# EAGLE board MRCS-Hankscraft-Contact-array (EAGLE 7.7.0)
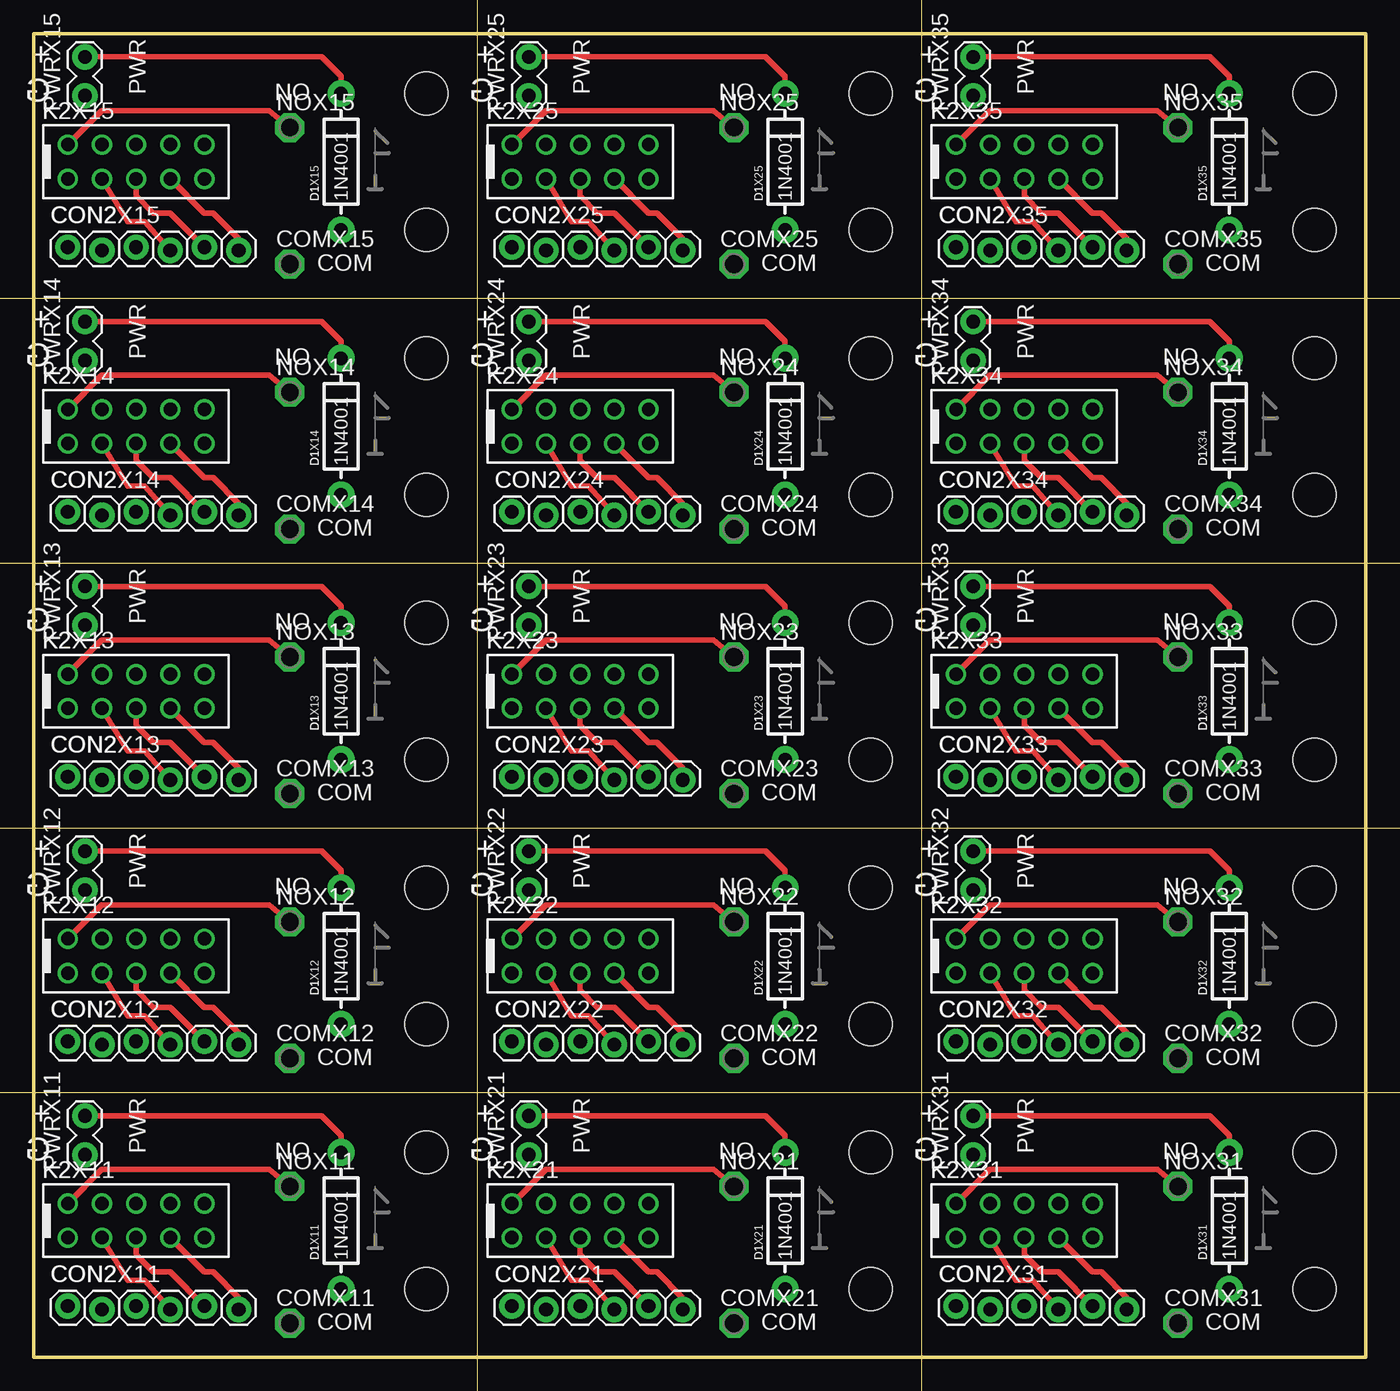
[diagram p0: board, top side]
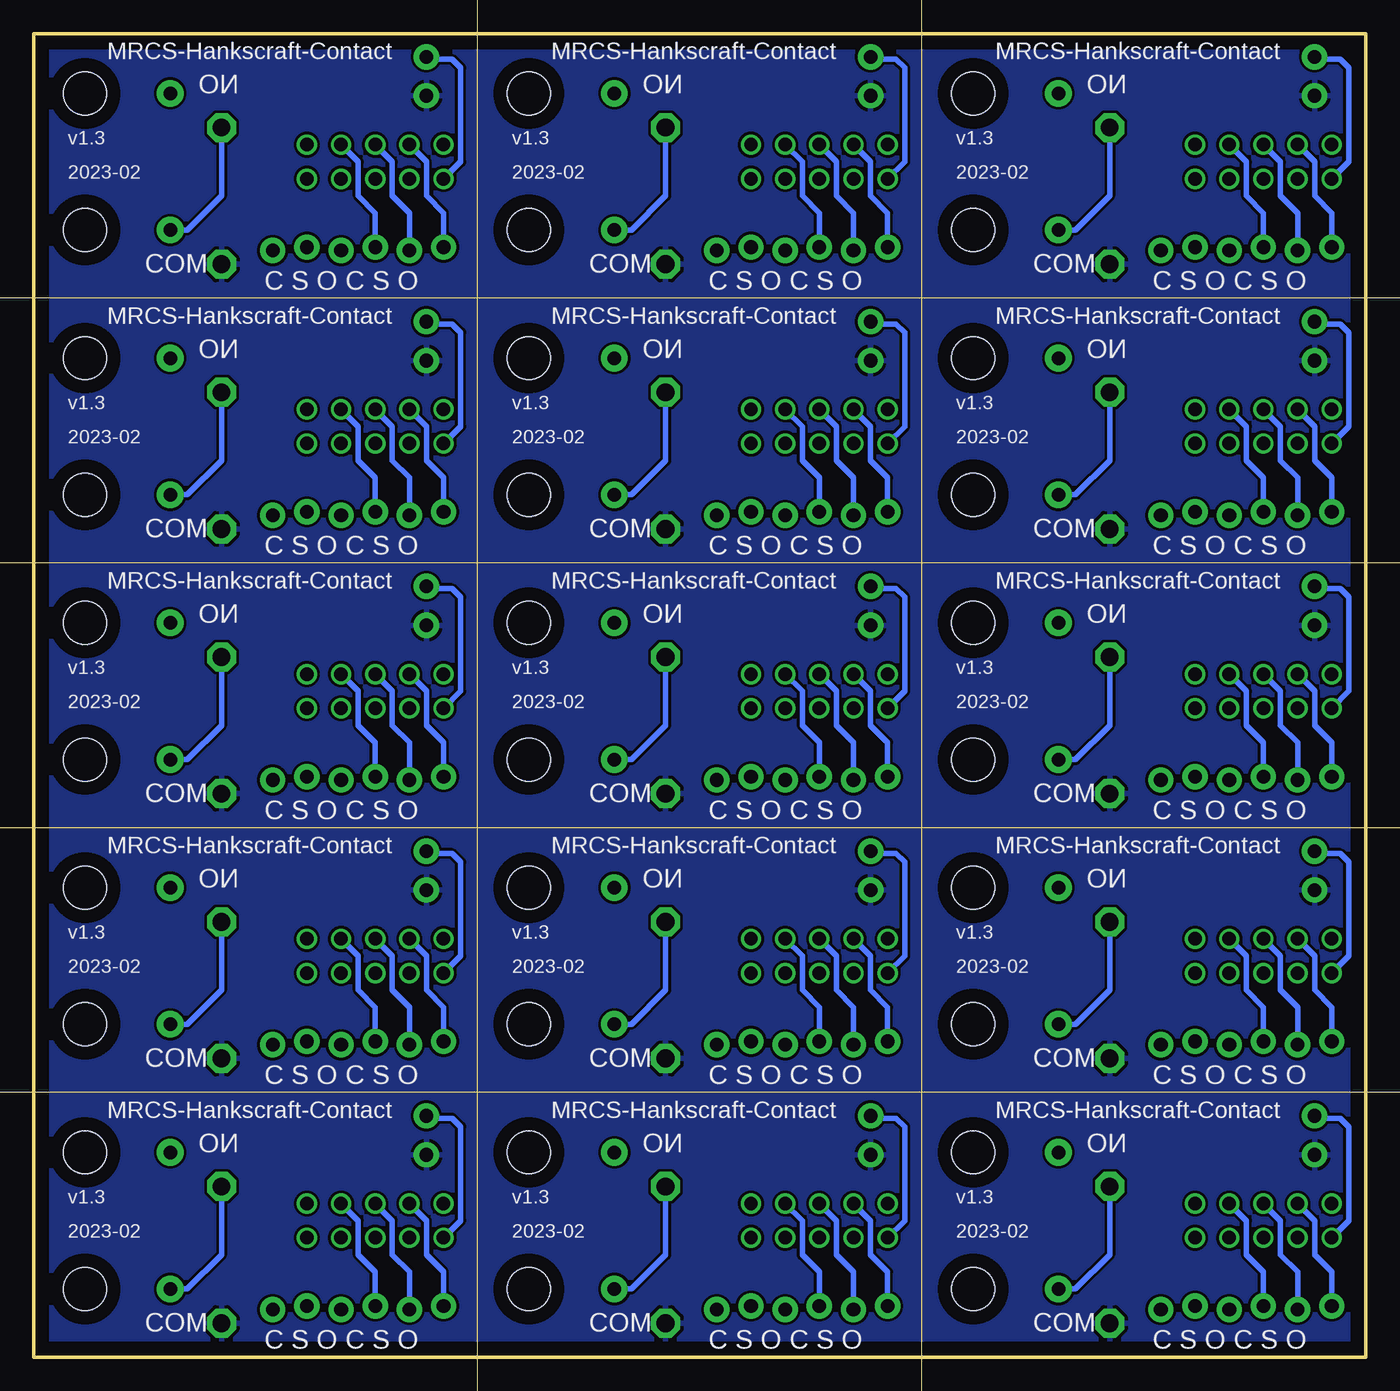
[diagram p1: board, bottom side, seen from below]

Size 99.06 x 98.42 mm. Coordinates in mm from the lower left corner, seen from the top.
Outline: 0,0 99.06,0 99.06,98.42 0,98.42 0,0
Copper layers (1*16): Top 0.035mm / dielectric 1.5mm / Bottom 0.035mm
Design rules "default": minimum track width 10mil, minimum drill 24mil, track to track 8mil, track to pad 8mil, pad to pad 8mil, via to via 8mil, smd to smd 8mil, copper to edge 40mil, drill to drill 8mil, minimum pad ring 10mil, minimum via ring 8mil, stop-mask expansion 4mil, vias tented up to drill 0mil, thermal gap 10mil
Holes 3.2 mm at 29.21,15.24 29.21,5.08 29.21,34.92 29.21,24.77 29.21,54.61 29.21,44.45 29.21,74.3 29.21,64.14 29.21,93.98 29.21,83.82 62.23,15.24 62.23,5.08 62.23,34.92 62.23,24.77 62.23,54.61 62.23,44.45 62.23,74.3 62.23,64.14 62.23,93.98 62.23,83.82 95.25,15.24 95.25,5.08 95.25,34.92 95.25,24.77 95.25,54.61 95.25,44.45 95.25,74.3 95.25,64.14 95.25,93.98 95.25,83.82
Milling: 6 lines

## Footprints (pad centres in the part's own frame; a part is rotated, then mirrored left to right if it is on the bottom)
P1-13 = drill 1.321 pad 2.159 octagon: TP 0,0
1X06_LOCK = drill 1.016 pad 1.88: 1 0,0; 2 2.54,-0.254; 3 5.08,0; 4 7.62,-0.254; 5 10.16,0; 6 12.7,-0.254
DIODE-1N4001 = drill 1 pad 1.981: A 5.08,0; C -5.08,0
TN2 = drill 1: 1 -5.08,-1.27; 2 -2.54,-1.27; 3 0,-1.27; 4 2.54,-1.27; 5 5.08,-1.27; 6 5.08,1.27; 7 2.54,1.27; 8 0,1.27; 9 -2.54,1.27; 10 -5.08,1.27
1X02_LOCK = drill 1.016 pad 1.88: 1 -0.178,0; 2 2.718,0

## Placement (x,y rotation side)
COMX11  TPPAD1-13  [P1-13]  19.05,2.54 0 top
COMX12  TPPAD1-13  [P1-13]  19.05,22.23 0 top
COMX13  TPPAD1-13  [P1-13]  19.05,41.91 0 top
COMX14  TPPAD1-13  [P1-13]  19.05,61.59 0 top
COMX15  TPPAD1-13  [P1-13]  19.05,81.28 0 top
COMX21  TPPAD1-13  [P1-13]  52.07,2.54 0 top
COMX22  TPPAD1-13  [P1-13]  52.07,22.23 0 top
COMX23  TPPAD1-13  [P1-13]  52.07,41.91 0 top
COMX24  TPPAD1-13  [P1-13]  52.07,61.59 0 top
COMX25  TPPAD1-13  [P1-13]  52.07,81.28 0 top
COMX31  TPPAD1-13  [P1-13]  85.09,2.54 0 top
COMX32  TPPAD1-13  [P1-13]  85.09,22.23 0 top
COMX33  TPPAD1-13  [P1-13]  85.09,41.91 0 top
COMX34  TPPAD1-13  [P1-13]  85.09,61.59 0 top
COMX35  TPPAD1-13  [P1-13]  85.09,81.28 0 top
CON2X11  [1X06_LOCK]  2.54,3.81 0 top
CON2X12  [1X06_LOCK]  2.54,23.5 0 top
CON2X13  [1X06_LOCK]  2.54,43.18 0 top
CON2X14  [1X06_LOCK]  2.54,62.87 0 top
CON2X15  [1X06_LOCK]  2.54,82.55 0 top
CON2X21  [1X06_LOCK]  35.56,3.81 0 top
CON2X22  [1X06_LOCK]  35.56,23.5 0 top
CON2X23  [1X06_LOCK]  35.56,43.18 0 top
CON2X24  [1X06_LOCK]  35.56,62.87 0 top
CON2X25  [1X06_LOCK]  35.56,82.55 0 top
CON2X31  [1X06_LOCK]  68.58,3.81 0 top
CON2X32  [1X06_LOCK]  68.58,23.5 0 top
CON2X33  [1X06_LOCK]  68.58,43.18 0 top
CON2X34  [1X06_LOCK]  68.58,62.87 0 top
CON2X35  [1X06_LOCK]  68.58,82.55 0 top
D1X11  1N4001  [DIODE-1N4001]  22.86,10.16 270 top
D1X12  1N4001  [DIODE-1N4001]  22.86,29.84 270 top
D1X13  1N4001  [DIODE-1N4001]  22.86,49.53 270 top
D1X14  1N4001  [DIODE-1N4001]  22.86,69.22 270 top
D1X15  1N4001  [DIODE-1N4001]  22.86,88.9 270 top
D1X21  1N4001  [DIODE-1N4001]  55.88,10.16 270 top
D1X22  1N4001  [DIODE-1N4001]  55.88,29.84 270 top
D1X23  1N4001  [DIODE-1N4001]  55.88,49.53 270 top
D1X24  1N4001  [DIODE-1N4001]  55.88,69.22 270 top
D1X25  1N4001  [DIODE-1N4001]  55.88,88.9 270 top
D1X31  1N4001  [DIODE-1N4001]  88.9,10.16 270 top
D1X32  1N4001  [DIODE-1N4001]  88.9,29.84 270 top
D1X33  1N4001  [DIODE-1N4001]  88.9,49.53 270 top
D1X34  1N4001  [DIODE-1N4001]  88.9,69.22 270 top
D1X35  1N4001  [DIODE-1N4001]  88.9,88.9 270 top
K2X11  TN2-4.5V  [TN2]  7.62,10.16 0 top
K2X12  TN2-4.5V  [TN2]  7.62,29.84 0 top
K2X13  TN2-4.5V  [TN2]  7.62,49.53 0 top
K2X14  TN2-4.5V  [TN2]  7.62,69.22 0 top
K2X15  TN2-4.5V  [TN2]  7.62,88.9 0 top
K2X21  TN2-4.5V  [TN2]  40.64,10.16 0 top
K2X22  TN2-4.5V  [TN2]  40.64,29.84 0 top
K2X23  TN2-4.5V  [TN2]  40.64,49.53 0 top
K2X24  TN2-4.5V  [TN2]  40.64,69.22 0 top
K2X25  TN2-4.5V  [TN2]  40.64,88.9 0 top
K2X31  TN2-4.5V  [TN2]  73.66,10.16 0 top
K2X32  TN2-4.5V  [TN2]  73.66,29.84 0 top
K2X33  TN2-4.5V  [TN2]  73.66,49.53 0 top
K2X34  TN2-4.5V  [TN2]  73.66,69.22 0 top
K2X35  TN2-4.5V  [TN2]  73.66,88.9 0 top
NOX11  TPPAD1-13  [P1-13]  19.05,12.7 0 top
NOX12  TPPAD1-13  [P1-13]  19.05,32.38 0 top
NOX13  TPPAD1-13  [P1-13]  19.05,52.07 0 top
NOX14  TPPAD1-13  [P1-13]  19.05,71.75 0 top
NOX15  TPPAD1-13  [P1-13]  19.05,91.44 0 top
NOX21  TPPAD1-13  [P1-13]  52.07,12.7 0 top
NOX22  TPPAD1-13  [P1-13]  52.07,32.38 0 top
NOX23  TPPAD1-13  [P1-13]  52.07,52.07 0 top
NOX24  TPPAD1-13  [P1-13]  52.07,71.75 0 top
NOX25  TPPAD1-13  [P1-13]  52.07,91.44 0 top
NOX31  TPPAD1-13  [P1-13]  85.09,12.7 0 top
NOX32  TPPAD1-13  [P1-13]  85.09,32.38 0 top
NOX33  TPPAD1-13  [P1-13]  85.09,52.07 0 top
NOX34  TPPAD1-13  [P1-13]  85.09,71.75 0 top
NOX35  TPPAD1-13  [P1-13]  85.09,91.44 0 top
PWRX11  [1X02_LOCK]  3.81,15.24 90 top
PWRX12  [1X02_LOCK]  3.81,34.92 90 top
PWRX13  [1X02_LOCK]  3.81,54.61 90 top
PWRX14  [1X02_LOCK]  3.81,74.3 90 top
PWRX15  [1X02_LOCK]  3.81,93.98 90 top
PWRX21  [1X02_LOCK]  36.83,15.24 90 top
PWRX22  [1X02_LOCK]  36.83,34.92 90 top
PWRX23  [1X02_LOCK]  36.83,54.61 90 top
PWRX24  [1X02_LOCK]  36.83,74.3 90 top
PWRX25  [1X02_LOCK]  36.83,93.98 90 top
PWRX31  [1X02_LOCK]  69.85,15.24 90 top
PWRX32  [1X02_LOCK]  69.85,34.92 90 top
PWRX33  [1X02_LOCK]  69.85,54.61 90 top
PWRX34  [1X02_LOCK]  69.85,74.3 90 top
PWRX35  [1X02_LOCK]  69.85,93.98 90 top
U$1X11  [MRCSLOGOTOP]  24.13,7.62 0 top
U$1X12  [MRCSLOGOTOP]  24.13,27.3 0 top
U$1X13  [MRCSLOGOTOP]  24.13,46.99 0 top
U$1X14  [MRCSLOGOTOP]  24.13,66.67 0 top
U$1X15  [MRCSLOGOTOP]  24.13,86.36 0 top
U$1X21  [MRCSLOGOTOP]  57.15,7.62 0 top
U$1X22  [MRCSLOGOTOP]  57.15,27.3 0 top
U$1X23  [MRCSLOGOTOP]  57.15,46.99 0 top
U$1X24  [MRCSLOGOTOP]  57.15,66.67 0 top
U$1X25  [MRCSLOGOTOP]  57.15,86.36 0 top
U$1X31  [MRCSLOGOTOP]  90.17,7.62 0 top
U$1X32  [MRCSLOGOTOP]  90.17,27.3 0 top
U$1X33  [MRCSLOGOTOP]  90.17,46.99 0 top
U$1X34  [MRCSLOGOTOP]  90.17,66.67 0 top
U$1X35  [MRCSLOGOTOP]  90.17,86.36 0 top

## Library data of the parts
COMX11-COMX15 COMX21-COMX25 COMX31-COMX35 NOX11-NOX15 NOX21-NOX25 NOX31-NOX35 = testpad
CON2X11-CON2X15 CON2X21-CON2X25 CON2X31-CON2X35 D1X11-D1X15 D1X21-D1X25 D1X31-D1X35 PWRX11-PWRX15 PWRX21-PWRX25 PWRX31-PWRX35 = SPCoast
K2X11-K2X15 K2X21-K2X25 K2X31-K2X35 = relay
U$1X11-U$1X15 U$1X21-U$1X25 U$1X31-U$1X35 = MRCSLogoTop

## Nets
GNDX11: COMX11.TP PWRX11.1
GNDX12: COMX12.TP PWRX12.1
GNDX13: COMX13.TP PWRX13.1
GNDX14: COMX14.TP PWRX14.1
GNDX15: COMX15.TP PWRX15.1
GNDX21: COMX21.TP PWRX21.1
GNDX22: COMX22.TP PWRX22.1
GNDX23: COMX23.TP PWRX23.1
GNDX24: COMX24.TP PWRX24.1
GNDX25: COMX25.TP PWRX25.1
GNDX31: COMX31.TP PWRX31.1
GNDX32: COMX32.TP PWRX32.1
GNDX33: COMX33.TP PWRX33.1
GNDX34: COMX34.TP PWRX34.1
GNDX35: COMX35.TP PWRX35.1
N$1X11: CON2X11.2 K2X11.8
N$1X12: CON2X12.2 K2X12.8
N$1X13: CON2X13.2 K2X13.8
N$1X14: CON2X14.2 K2X14.8
N$1X15: CON2X15.2 K2X15.8
N$1X21: CON2X21.2 K2X21.8
N$1X22: CON2X22.2 K2X22.8
N$1X23: CON2X23.2 K2X23.8
N$1X24: CON2X24.2 K2X24.8
N$1X25: CON2X25.2 K2X25.8
N$1X31: CON2X31.2 K2X31.8
N$1X32: CON2X32.2 K2X32.8
N$1X33: CON2X33.2 K2X33.8
N$1X34: CON2X34.2 K2X34.8
N$1X35: CON2X35.2 K2X35.8
N$2X11: CON2X11.3 K2X11.7
N$2X12: CON2X12.3 K2X12.7
N$2X13: CON2X13.3 K2X13.7
N$2X14: CON2X14.3 K2X14.7
N$2X15: CON2X15.3 K2X15.7
N$2X21: CON2X21.3 K2X21.7
N$2X22: CON2X22.3 K2X22.7
N$2X23: CON2X23.3 K2X23.7
N$2X24: CON2X24.3 K2X24.7
N$2X25: CON2X25.3 K2X25.7
N$2X31: CON2X31.3 K2X31.7
N$2X32: CON2X32.3 K2X32.7
N$2X33: CON2X33.3 K2X33.7
N$2X34: CON2X34.3 K2X34.7
N$2X35: CON2X35.3 K2X35.7
N$3X11: CON2X11.1 K2X11.9
N$3X12: CON2X12.1 K2X12.9
N$3X13: CON2X13.1 K2X13.9
N$3X14: CON2X14.1 K2X14.9
N$3X15: CON2X15.1 K2X15.9
N$3X21: CON2X21.1 K2X21.9
N$3X22: CON2X22.1 K2X22.9
N$3X23: CON2X23.1 K2X23.9
N$3X24: CON2X24.1 K2X24.9
N$3X25: CON2X25.1 K2X25.9
N$3X31: CON2X31.1 K2X31.9
N$3X32: CON2X32.1 K2X32.9
N$3X33: CON2X33.1 K2X33.9
N$3X34: CON2X34.1 K2X34.9
N$3X35: CON2X35.1 K2X35.9
N$4X11: CON2X11.4 K2X11.2
N$4X12: CON2X12.4 K2X12.2
N$4X13: CON2X13.4 K2X13.2
N$4X14: CON2X14.4 K2X14.2
N$4X15: CON2X15.4 K2X15.2
N$4X21: CON2X21.4 K2X21.2
N$4X22: CON2X22.4 K2X22.2
N$4X23: CON2X23.4 K2X23.2
N$4X24: CON2X24.4 K2X24.2
N$4X25: CON2X25.4 K2X25.2
N$4X31: CON2X31.4 K2X31.2
N$4X32: CON2X32.4 K2X32.2
N$4X33: CON2X33.4 K2X33.2
N$4X34: CON2X34.4 K2X34.2
N$4X35: CON2X35.4 K2X35.2
N$5X11: CON2X11.5 K2X11.3
N$5X12: CON2X12.5 K2X12.3
N$5X13: CON2X13.5 K2X13.3
N$5X14: CON2X14.5 K2X14.3
N$5X15: CON2X15.5 K2X15.3
N$5X21: CON2X21.5 K2X21.3
N$5X22: CON2X22.5 K2X22.3
N$5X23: CON2X23.5 K2X23.3
N$5X24: CON2X24.5 K2X24.3
N$5X25: CON2X25.5 K2X25.3
N$5X31: CON2X31.5 K2X31.3
N$5X32: CON2X32.5 K2X32.3
N$5X33: CON2X33.5 K2X33.3
N$5X34: CON2X34.5 K2X34.3
N$5X35: CON2X35.5 K2X35.3
N$6X11: CON2X11.6 K2X11.4
N$6X12: CON2X12.6 K2X12.4
N$6X13: CON2X13.6 K2X13.4
N$6X14: CON2X14.6 K2X14.4
N$6X15: CON2X15.6 K2X15.4
N$6X21: CON2X21.6 K2X21.4
N$6X22: CON2X22.6 K2X22.4
N$6X23: CON2X23.6 K2X23.4
N$6X24: CON2X24.6 K2X24.4
N$6X25: CON2X25.6 K2X25.4
N$6X31: CON2X31.6 K2X31.4
N$6X32: CON2X32.6 K2X32.4
N$6X33: CON2X33.6 K2X33.4
N$6X34: CON2X34.6 K2X34.4
N$6X35: CON2X35.6 K2X35.4
N$7X11: D1X11.C K2X11.1 PWRX11.2
N$7X12: D1X12.C K2X12.1 PWRX12.2
N$7X13: D1X13.C K2X13.1 PWRX13.2
N$7X14: D1X14.C K2X14.1 PWRX14.2
N$7X15: D1X15.C K2X15.1 PWRX15.2
N$7X21: D1X21.C K2X21.1 PWRX21.2
N$7X22: D1X22.C K2X22.1 PWRX22.2
N$7X23: D1X23.C K2X23.1 PWRX23.2
N$7X24: D1X24.C K2X24.1 PWRX24.2
N$7X25: D1X25.C K2X25.1 PWRX25.2
N$7X31: D1X31.C K2X31.1 PWRX31.2
N$7X32: D1X32.C K2X32.1 PWRX32.2
N$7X33: D1X33.C K2X33.1 PWRX33.2
N$7X34: D1X34.C K2X34.1 PWRX34.2
N$7X35: D1X35.C K2X35.1 PWRX35.2
N$9X11: D1X11.A K2X11.10 NOX11.TP
N$9X12: D1X12.A K2X12.10 NOX12.TP
N$9X13: D1X13.A K2X13.10 NOX13.TP
N$9X14: D1X14.A K2X14.10 NOX14.TP
N$9X15: D1X15.A K2X15.10 NOX15.TP
N$9X21: D1X21.A K2X21.10 NOX21.TP
N$9X22: D1X22.A K2X22.10 NOX22.TP
N$9X23: D1X23.A K2X23.10 NOX23.TP
N$9X24: D1X24.A K2X24.10 NOX24.TP
N$9X25: D1X25.A K2X25.10 NOX25.TP
N$9X31: D1X31.A K2X31.10 NOX31.TP
N$9X32: D1X32.A K2X32.10 NOX32.TP
N$9X33: D1X33.A K2X33.10 NOX33.TP
N$9X34: D1X34.A K2X34.10 NOX34.TP
N$9X35: D1X35.A K2X35.10 NOX35.TP

## Tracks (layer width: path | path; a pad name or v marks a point on that pad's centre or on a via)
GNDX11
  pour Bottom: 0,0 33.02,0 33.02,19.68 0,19.68
GNDX12
  pour Bottom: 0,19.68 33.02,19.68 33.02,39.37 0,39.37
GNDX13
  pour Bottom: 0,39.37 33.02,39.37 33.02,59.05 0,59.05
GNDX14
  pour Bottom: 0,59.05 33.02,59.05 33.02,78.74 0,78.74
GNDX15
  pour Bottom: 0,78.74 33.02,78.74 33.02,98.42 0,98.42
GNDX21
  pour Bottom: 33.02,0 66.04,0 66.04,19.68 33.02,19.68
GNDX22
  pour Bottom: 33.02,19.68 66.04,19.68 66.04,39.37 33.02,39.37
GNDX23
  pour Bottom: 33.02,39.37 66.04,39.37 66.04,59.05 33.02,59.05
GNDX24
  pour Bottom: 33.02,59.05 66.04,59.05 66.04,78.74 33.02,78.74
GNDX25
  pour Bottom: 33.02,78.74 66.04,78.74 66.04,98.42 33.02,98.42
GNDX31
  pour Bottom: 66.04,0 99.06,0 99.06,19.68 66.04,19.68
GNDX32
  pour Bottom: 66.04,19.68 99.06,19.68 99.06,39.37 66.04,39.37
GNDX33
  pour Bottom: 66.04,39.37 99.06,39.37 99.06,59.05 66.04,59.05
GNDX34
  pour Bottom: 66.04,59.05 99.06,59.05 99.06,78.74 66.04,78.74
GNDX35
  pour Bottom: 66.04,78.74 99.06,78.74 99.06,98.42 66.04,98.42
N$1X11
  Bottom 0.406: CON2X11.2 5.08,6.35 6.35,7.62 6.35,10.16 K2X11.8
N$1X12
  Bottom 0.406: CON2X12.2 5.08,26.04 6.35,27.3 6.35,29.84 K2X12.8
N$1X13
  Bottom 0.406: CON2X13.2 5.08,45.72 6.35,46.99 6.35,49.53 K2X13.8
N$1X14
  Bottom 0.406: CON2X14.2 5.08,65.41 6.35,66.67 6.35,69.22 K2X14.8
N$1X15
  Bottom 0.406: CON2X15.2 5.08,85.09 6.35,86.36 6.35,88.9 K2X15.8
N$1X21
  Bottom 0.406: CON2X21.2 38.1,6.35 39.37,7.62 39.37,10.16 K2X21.8
N$1X22
  Bottom 0.406: CON2X22.2 38.1,26.04 39.37,27.3 39.37,29.84 K2X22.8
N$1X23
  Bottom 0.406: CON2X23.2 38.1,45.72 39.37,46.99 39.37,49.53 K2X23.8
N$1X24
  Bottom 0.406: CON2X24.2 38.1,65.41 39.37,66.67 39.37,69.22 K2X24.8
N$1X25
  Bottom 0.406: CON2X25.2 38.1,85.09 39.37,86.36 39.37,88.9 K2X25.8
N$1X31
  Bottom 0.406: CON2X31.2 71.12,6.35 72.39,7.62 72.39,10.16 K2X31.8
N$1X32
  Bottom 0.406: CON2X32.2 71.12,26.04 72.39,27.3 72.39,29.84 K2X32.8
N$1X33
  Bottom 0.406: CON2X33.2 71.12,45.72 72.39,46.99 72.39,49.53 K2X33.8
N$1X34
  Bottom 0.406: CON2X34.2 71.12,65.41 72.39,66.67 72.39,69.22 K2X34.8
N$1X35
  Bottom 0.406: CON2X35.2 71.12,85.09 72.39,86.36 72.39,88.9 K2X35.8
N$2X11
  Bottom 0.406: CON2X11.3 7.62,6.35 8.89,7.62 8.89,10.16 K2X11.7
N$2X12
  Bottom 0.406: CON2X12.3 7.62,26.04 8.89,27.3 8.89,29.84 K2X12.7
N$2X13
  Bottom 0.406: CON2X13.3 7.62,45.72 8.89,46.99 8.89,49.53 K2X13.7
N$2X14
  Bottom 0.406: CON2X14.3 7.62,65.41 8.89,66.67 8.89,69.22 K2X14.7
N$2X15
  Bottom 0.406: CON2X15.3 7.62,85.09 8.89,86.36 8.89,88.9 K2X15.7
N$2X21
  Bottom 0.406: CON2X21.3 40.64,6.35 41.91,7.62 41.91,10.16 K2X21.7
N$2X22
  Bottom 0.406: CON2X22.3 40.64,26.04 41.91,27.3 41.91,29.84 K2X22.7
N$2X23
  Bottom 0.406: CON2X23.3 40.64,45.72 41.91,46.99 41.91,49.53 K2X23.7
N$2X24
  Bottom 0.406: CON2X24.3 40.64,65.41 41.91,66.67 41.91,69.22 K2X24.7
N$2X25
  Bottom 0.406: CON2X25.3 40.64,85.09 41.91,86.36 41.91,88.9 K2X25.7
N$2X31
  Bottom 0.406: CON2X31.3 73.66,6.35 74.93,7.62 74.93,10.16 K2X31.7
N$2X32
  Bottom 0.406: CON2X32.3 73.66,26.04 74.93,27.3 74.93,29.84 K2X32.7
N$2X33
  Bottom 0.406: CON2X33.3 73.66,45.72 74.93,46.99 74.93,49.53 K2X33.7
N$2X34
  Bottom 0.406: CON2X34.3 73.66,65.41 74.93,66.67 74.93,69.22 K2X34.7
N$2X35
  Bottom 0.406: CON2X35.3 73.66,85.09 74.93,86.36 74.93,88.9 K2X35.7
N$3X11
  Bottom 0.406: CON2X11.1 2.54,6.35 3.81,7.62 3.81,10.16 K2X11.9
N$3X12
  Bottom 0.406: CON2X12.1 2.54,26.04 3.81,27.3 3.81,29.84 K2X12.9
N$3X13
  Bottom 0.406: CON2X13.1 2.54,45.72 3.81,46.99 3.81,49.53 K2X13.9
N$3X14
  Bottom 0.406: CON2X14.1 2.54,65.41 3.81,66.67 3.81,69.22 K2X14.9
N$3X15
  Bottom 0.406: CON2X15.1 2.54,85.09 3.81,86.36 3.81,88.9 K2X15.9
N$3X21
  Bottom 0.406: CON2X21.1 35.56,6.35 36.83,7.62 36.83,10.16 K2X21.9
N$3X22
  Bottom 0.406: CON2X22.1 35.56,26.04 36.83,27.3 36.83,29.84 K2X22.9
N$3X23
  Bottom 0.406: CON2X23.1 35.56,45.72 36.83,46.99 36.83,49.53 K2X23.9
N$3X24
  Bottom 0.406: CON2X24.1 35.56,65.41 36.83,66.67 36.83,69.22 K2X24.9
N$3X25
  Bottom 0.406: CON2X25.1 35.56,85.09 36.83,86.36 36.83,88.9 K2X25.9
N$3X31
  Bottom 0.406: CON2X31.1 68.58,6.35 69.85,7.62 69.85,10.16 K2X31.9
N$3X32
  Bottom 0.406: CON2X32.1 68.58,26.04 69.85,27.3 69.85,29.84 K2X32.9
N$3X33
  Bottom 0.406: CON2X33.1 68.58,45.72 69.85,46.99 69.85,49.53 K2X33.9
N$3X34
  Bottom 0.406: CON2X34.1 68.58,65.41 69.85,66.67 69.85,69.22 K2X34.9
N$3X35
  Bottom 0.406: CON2X35.1 68.58,85.09 69.85,86.36 69.85,88.9 K2X35.9
N$4X11
  Top 0.406: K2X11.2 6.99,5.71 8.26,5.71 CON2X11.4
N$4X12
  Top 0.406: K2X12.2 6.99,25.4 8.26,25.4 CON2X12.4
N$4X13
  Top 0.406: K2X13.2 6.99,45.09 8.26,45.09 CON2X13.4
N$4X14
  Top 0.406: K2X14.2 6.99,64.77 8.26,64.77 CON2X14.4
N$4X15
  Top 0.406: K2X15.2 6.99,84.45 8.26,84.45 CON2X15.4
N$4X21
  Top 0.406: K2X21.2 40.01,5.71 41.27,5.71 CON2X21.4
N$4X22
  Top 0.406: K2X22.2 40.01,25.4 41.27,25.4 CON2X22.4
N$4X23
  Top 0.406: K2X23.2 40.01,45.09 41.27,45.09 CON2X23.4
N$4X24
  Top 0.406: K2X24.2 40.01,64.77 41.27,64.77 CON2X24.4
N$4X25
  Top 0.406: K2X25.2 40.01,84.45 41.27,84.45 CON2X25.4
N$4X31
  Top 0.406: K2X31.2 73.03,5.71 74.3,5.71 CON2X31.4
N$4X32
  Top 0.406: K2X32.2 73.03,25.4 74.3,25.4 CON2X32.4
N$4X33
  Top 0.406: K2X33.2 73.03,45.09 74.3,45.09 CON2X33.4
N$4X34
  Top 0.406: K2X34.2 73.03,64.77 74.3,64.77 CON2X34.4
N$4X35
  Top 0.406: K2X35.2 73.03,84.45 74.3,84.45 CON2X35.4
N$5X11
  Top 0.406: K2X11.3 7.62,7.62 8.89,6.35 10.16,6.35 CON2X11.5
N$5X12
  Top 0.406: K2X12.3 7.62,27.3 8.89,26.04 10.16,26.04 CON2X12.5
N$5X13
  Top 0.406: K2X13.3 7.62,46.99 8.89,45.72 10.16,45.72 CON2X13.5
N$5X14
  Top 0.406: K2X14.3 7.62,66.67 8.89,65.41 10.16,65.41 CON2X14.5
N$5X15
  Top 0.406: K2X15.3 7.62,86.36 8.89,85.09 10.16,85.09 CON2X15.5
N$5X21
  Top 0.406: K2X21.3 40.64,7.62 41.91,6.35 43.18,6.35 CON2X21.5
N$5X22
  Top 0.406: K2X22.3 40.64,27.3 41.91,26.04 43.18,26.04 CON2X22.5
N$5X23
  Top 0.406: K2X23.3 40.64,46.99 41.91,45.72 43.18,45.72 CON2X23.5
N$5X24
  Top 0.406: K2X24.3 40.64,66.67 41.91,65.41 43.18,65.41 CON2X24.5
N$5X25
  Top 0.406: K2X25.3 40.64,86.36 41.91,85.09 43.18,85.09 CON2X25.5
N$5X31
  Top 0.406: K2X31.3 73.66,7.62 74.93,6.35 76.2,6.35 CON2X31.5
N$5X32
  Top 0.406: K2X32.3 73.66,27.3 74.93,26.04 76.2,26.04 CON2X32.5
N$5X33
  Top 0.406: K2X33.3 73.66,46.99 74.93,45.72 76.2,45.72 CON2X33.5
N$5X34
  Top 0.406: K2X34.3 73.66,66.67 74.93,65.41 76.2,65.41 CON2X34.5
N$5X35
  Top 0.406: K2X35.3 73.66,86.36 74.93,85.09 76.2,85.09 CON2X35.5
N$6X11
  Top 0.406: K2X11.4 12.7,6.35 13.34,6.35 15.24,4.45 CON2X11.6
N$6X12
  Top 0.406: K2X12.4 12.7,26.04 13.34,26.04 15.24,24.13 CON2X12.6
N$6X13
  Top 0.406: K2X13.4 12.7,45.72 13.34,45.72 15.24,43.81 CON2X13.6
N$6X14
  Top 0.406: K2X14.4 12.7,65.41 13.34,65.41 15.24,63.5 CON2X14.6
N$6X15
  Top 0.406: K2X15.4 12.7,85.09 13.34,85.09 15.24,83.19 CON2X15.6
N$6X21
  Top 0.406: K2X21.4 45.72,6.35 46.35,6.35 48.26,4.45 CON2X21.6
N$6X22
  Top 0.406: K2X22.4 45.72,26.04 46.35,26.04 48.26,24.13 CON2X22.6
N$6X23
  Top 0.406: K2X23.4 45.72,45.72 46.35,45.72 48.26,43.81 CON2X23.6
N$6X24
  Top 0.406: K2X24.4 45.72,65.41 46.35,65.41 48.26,63.5 CON2X24.6
N$6X25
  Top 0.406: K2X25.4 45.72,85.09 46.35,85.09 48.26,83.19 CON2X25.6
N$6X31
  Top 0.406: K2X31.4 78.74,6.35 79.38,6.35 81.28,4.45 CON2X31.6
N$6X32
  Top 0.406: K2X32.4 78.74,26.04 79.38,26.04 81.28,24.13 CON2X32.6
N$6X33
  Top 0.406: K2X33.4 78.74,45.72 79.38,45.72 81.28,43.81 CON2X33.6
N$6X34
  Top 0.406: K2X34.4 78.74,65.41 79.38,65.41 81.28,63.5 CON2X34.6
N$6X35
  Top 0.406: K2X35.4 78.74,85.09 79.38,85.09 81.28,83.19 CON2X35.6
N$7X11
  Top 0.406: PWRX11.2 21.41,17.96 22.86,16.51 D1X11.C
  Bottom 0.406: K2X11.1 1.27,10.16 1.27,17.14 1.91,17.78 3.63,17.78 PWRX11.2
N$7X12
  Top 0.406: PWRX12.2 21.41,37.64 22.86,36.2 D1X12.C
  Bottom 0.406: K2X12.1 1.27,29.84 1.27,36.83 1.91,37.47 3.63,37.47 PWRX12.2
N$7X13
  Top 0.406: PWRX13.2 21.41,57.33 22.86,55.88 D1X13.C
  Bottom 0.406: K2X13.1 1.27,49.53 1.27,56.52 1.91,57.15 3.63,57.15 PWRX13.2
N$7X14
  Top 0.406: PWRX14.2 21.41,77.01 22.86,75.56 D1X14.C
  Bottom 0.406: K2X14.1 1.27,69.22 1.27,76.2 1.91,76.83 3.63,76.83 PWRX14.2
N$7X15
  Top 0.406: PWRX15.2 21.41,96.7 22.86,95.25 D1X15.C
  Bottom 0.406: K2X15.1 1.27,88.9 1.27,95.89 1.91,96.52 3.63,96.52 PWRX15.2
N$7X21
  Top 0.406: PWRX21.2 54.43,17.96 55.88,16.51 D1X21.C
  Bottom 0.406: K2X21.1 34.29,10.16 34.29,17.14 34.92,17.78 36.65,17.78 PWRX21.2
N$7X22
  Top 0.406: PWRX22.2 54.43,37.64 55.88,36.2 D1X22.C
  Bottom 0.406: K2X22.1 34.29,29.84 34.29,36.83 34.92,37.47 36.65,37.47 PWRX22.2
N$7X23
  Top 0.406: PWRX23.2 54.43,57.33 55.88,55.88 D1X23.C
  Bottom 0.406: K2X23.1 34.29,49.53 34.29,56.52 34.92,57.15 36.65,57.15 PWRX23.2
N$7X24
  Top 0.406: PWRX24.2 54.43,77.01 55.88,75.56 D1X24.C
  Bottom 0.406: K2X24.1 34.29,69.22 34.29,76.2 34.92,76.83 36.65,76.83 PWRX24.2
N$7X25
  Top 0.406: PWRX25.2 54.43,96.7 55.88,95.25 D1X25.C
  Bottom 0.406: K2X25.1 34.29,88.9 34.29,95.89 34.92,96.52 36.65,96.52 PWRX25.2
N$7X31
  Top 0.406: PWRX31.2 87.45,17.96 88.9,16.51 D1X31.C
  Bottom 0.406: K2X31.1 67.31,10.16 67.31,17.14 67.94,17.78 69.67,17.78 PWRX31.2
N$7X32
  Top 0.406: PWRX32.2 87.45,37.64 88.9,36.2 D1X32.C
  Bottom 0.406: K2X32.1 67.31,29.84 67.31,36.83 67.94,37.47 69.67,37.47 PWRX32.2
N$7X33
  Top 0.406: PWRX33.2 87.45,57.33 88.9,55.88 D1X33.C
  Bottom 0.406: K2X33.1 67.31,49.53 67.31,56.52 67.94,57.15 69.67,57.15 PWRX33.2
N$7X34
  Top 0.406: PWRX34.2 87.45,77.01 88.9,75.56 D1X34.C
  Bottom 0.406: K2X34.1 67.31,69.22 67.31,76.2 67.94,76.83 69.67,76.83 PWRX34.2
N$7X35
  Top 0.406: PWRX35.2 87.45,96.7 88.9,95.25 D1X35.C
  Bottom 0.406: K2X35.1 67.31,88.9 67.31,95.89 67.94,96.52 69.67,96.52 PWRX35.2
N$9X11
  Top 0.406: K2X11.10 5.08,13.97 17.53,13.97 NOX11.TP
  Bottom 0.406: NOX11.TP 19.05,7.62 21.59,5.08 D1X11.A
N$9X12
  Top 0.406: K2X12.10 5.08,33.66 17.53,33.66 NOX12.TP
  Bottom 0.406: NOX12.TP 19.05,27.3 21.59,24.77 D1X12.A
N$9X13
  Top 0.406: K2X13.10 5.08,53.34 17.53,53.34 NOX13.TP
  Bottom 0.406: NOX13.TP 19.05,46.99 21.59,44.45 D1X13.A
N$9X14
  Top 0.406: K2X14.10 5.08,73.03 17.53,73.03 NOX14.TP
  Bottom 0.406: NOX14.TP 19.05,66.67 21.59,64.14 D1X14.A
N$9X15
  Top 0.406: K2X15.10 5.08,92.71 17.53,92.71 NOX15.TP
  Bottom 0.406: NOX15.TP 19.05,86.36 21.59,83.82 D1X15.A
N$9X21
  Top 0.406: K2X21.10 38.1,13.97 50.55,13.97 NOX21.TP
  Bottom 0.406: NOX21.TP 52.07,7.62 54.61,5.08 D1X21.A
N$9X22
  Top 0.406: K2X22.10 38.1,33.66 50.55,33.66 NOX22.TP
  Bottom 0.406: NOX22.TP 52.07,27.3 54.61,24.77 D1X22.A
N$9X23
  Top 0.406: K2X23.10 38.1,53.34 50.55,53.34 NOX23.TP
  Bottom 0.406: NOX23.TP 52.07,46.99 54.61,44.45 D1X23.A
N$9X24
  Top 0.406: K2X24.10 38.1,73.03 50.55,73.03 NOX24.TP
  Bottom 0.406: NOX24.TP 52.07,66.67 54.61,64.14 D1X24.A
N$9X25
  Top 0.406: K2X25.10 38.1,92.71 50.55,92.71 NOX25.TP
  Bottom 0.406: NOX25.TP 52.07,86.36 54.61,83.82 D1X25.A
N$9X31
  Top 0.406: K2X31.10 71.12,13.97 83.57,13.97 NOX31.TP
  Bottom 0.406: NOX31.TP 85.09,7.62 87.63,5.08 D1X31.A
N$9X32
  Top 0.406: K2X32.10 71.12,33.66 83.57,33.66 NOX32.TP
  Bottom 0.406: NOX32.TP 85.09,27.3 87.63,24.77 D1X32.A
N$9X33
  Top 0.406: K2X33.10 71.12,53.34 83.57,53.34 NOX33.TP
  Bottom 0.406: NOX33.TP 85.09,46.99 87.63,44.45 D1X33.A
N$9X34
  Top 0.406: K2X34.10 71.12,73.03 83.57,73.03 NOX34.TP
  Bottom 0.406: NOX34.TP 85.09,66.67 87.63,64.14 D1X34.A
N$9X35
  Top 0.406: K2X35.10 71.12,92.71 83.57,92.71 NOX35.TP
  Bottom 0.406: NOX35.TP 85.09,86.36 87.63,83.82 D1X35.A

## Text on the board
tPlace: + / G | + / G | + / G | + / G | + / G | + / G | + / G | + / G | + / G | + / G | + / G | + / G | + / G | + / G | + / G
bPlace: MRCS-Hankscraft-Contact | MRCS-Hankscraft-Contact | MRCS-Hankscraft-Contact | NO | NO | NO | v1.3 | v1.3 | v1.3 | 2023-02 | 2023-02 | 2023-02 | COM | COM | COM | C S O C S O | C S O C S O | C S O C S O | MRCS-Hankscraft-Contact | MRCS-Hankscraft-Contact | MRCS-Hankscraft-Contact | NO | NO | NO | v1.3 | v1.3 | v1.3 | 2023-02 | 2023-02 | 2023-02 | COM | COM | COM | C S O C S O | C S O C S O | C S O C S O | MRCS-Hankscraft-Contact | MRCS-Hankscraft-Contact | MRCS-Hankscraft-Contact | NO | NO | NO | v1.3 | v1.3 | v1.3 | 2023-02 | 2023-02 | 2023-02 | COM | COM | COM | C S O C S O | C S O C S O | C S O C S O | MRCS-Hankscraft-Contact | MRCS-Hankscraft-Contact | MRCS-Hankscraft-Contact | NO | NO | NO | v1.3 | v1.3 | v1.3 | 2023-02 | 2023-02 | 2023-02 | COM | COM | COM | C S O C S O | C S O C S O | C S O C S O | MRCS-Hankscraft-Contact | MRCS-Hankscraft-Contact | MRCS-Hankscraft-Contact | NO | NO | NO | v1.3 | v1.3 | v1.3 | 2023-02 | 2023-02 | 2023-02 | COM | COM | COM | C S O C S O | C S O C S O | C S O C S O
Milling: V-Score | V-Score | V-Score | V-Score | V-Score | V-Score
_tNames: PWR | PWR | PWR | NO | NO | NO | K2 | K2 | K2 | D1 | D1 | D1 | D1 | D1 | D1 | CON2 | CON2 | CON2 | CON2 | CON2 | CON2 | COM | COM | COM | PWR | NO | PWR | NO | PWR | NO | K2 | K2 | K2 | D1 | D1 | D1 | D1 | D1 | D1 | CON2 | CON2 | CON2 | CON2 | CON2 | CON2 | COM | COM | COM | PWR | PWR | PWR | NO | NO | NO | K2 | K2 | K2 | D1 | D1 | D1 | D1 | D1 | D1 | CON2 | CON2 | CON2 | CON2 | CON2 | CON2 | COM | COM | COM | PWR | PWR | PWR | NO | NO | NO | K2 | K2 | K2 | D1 | D1 | D1 | D1 | D1 | D1 | CON2 | CON2 | CON2 | CON2 | CON2 | CON2 | COM | COM | COM | PWR | NO | PWR | NO | PWR | NO | K2 | K2 | K2 | D1 | D1 | D1 | D1 | D1 | D1 | CON2 | CON2 | CON2 | CON2 | CON2 | CON2 | COM | COM | COM